# Altium PCB PCB2.PcbDoc
Units mm, origin at the board's own origin, x right, y up, seen from the top; angles counter-clockwise.
Board outline 100.2 x 80.01 mm, 2 copper layers (Top Layer, Bottom Layer); 22 components, 23 nets, 88 pads, 11 vias.
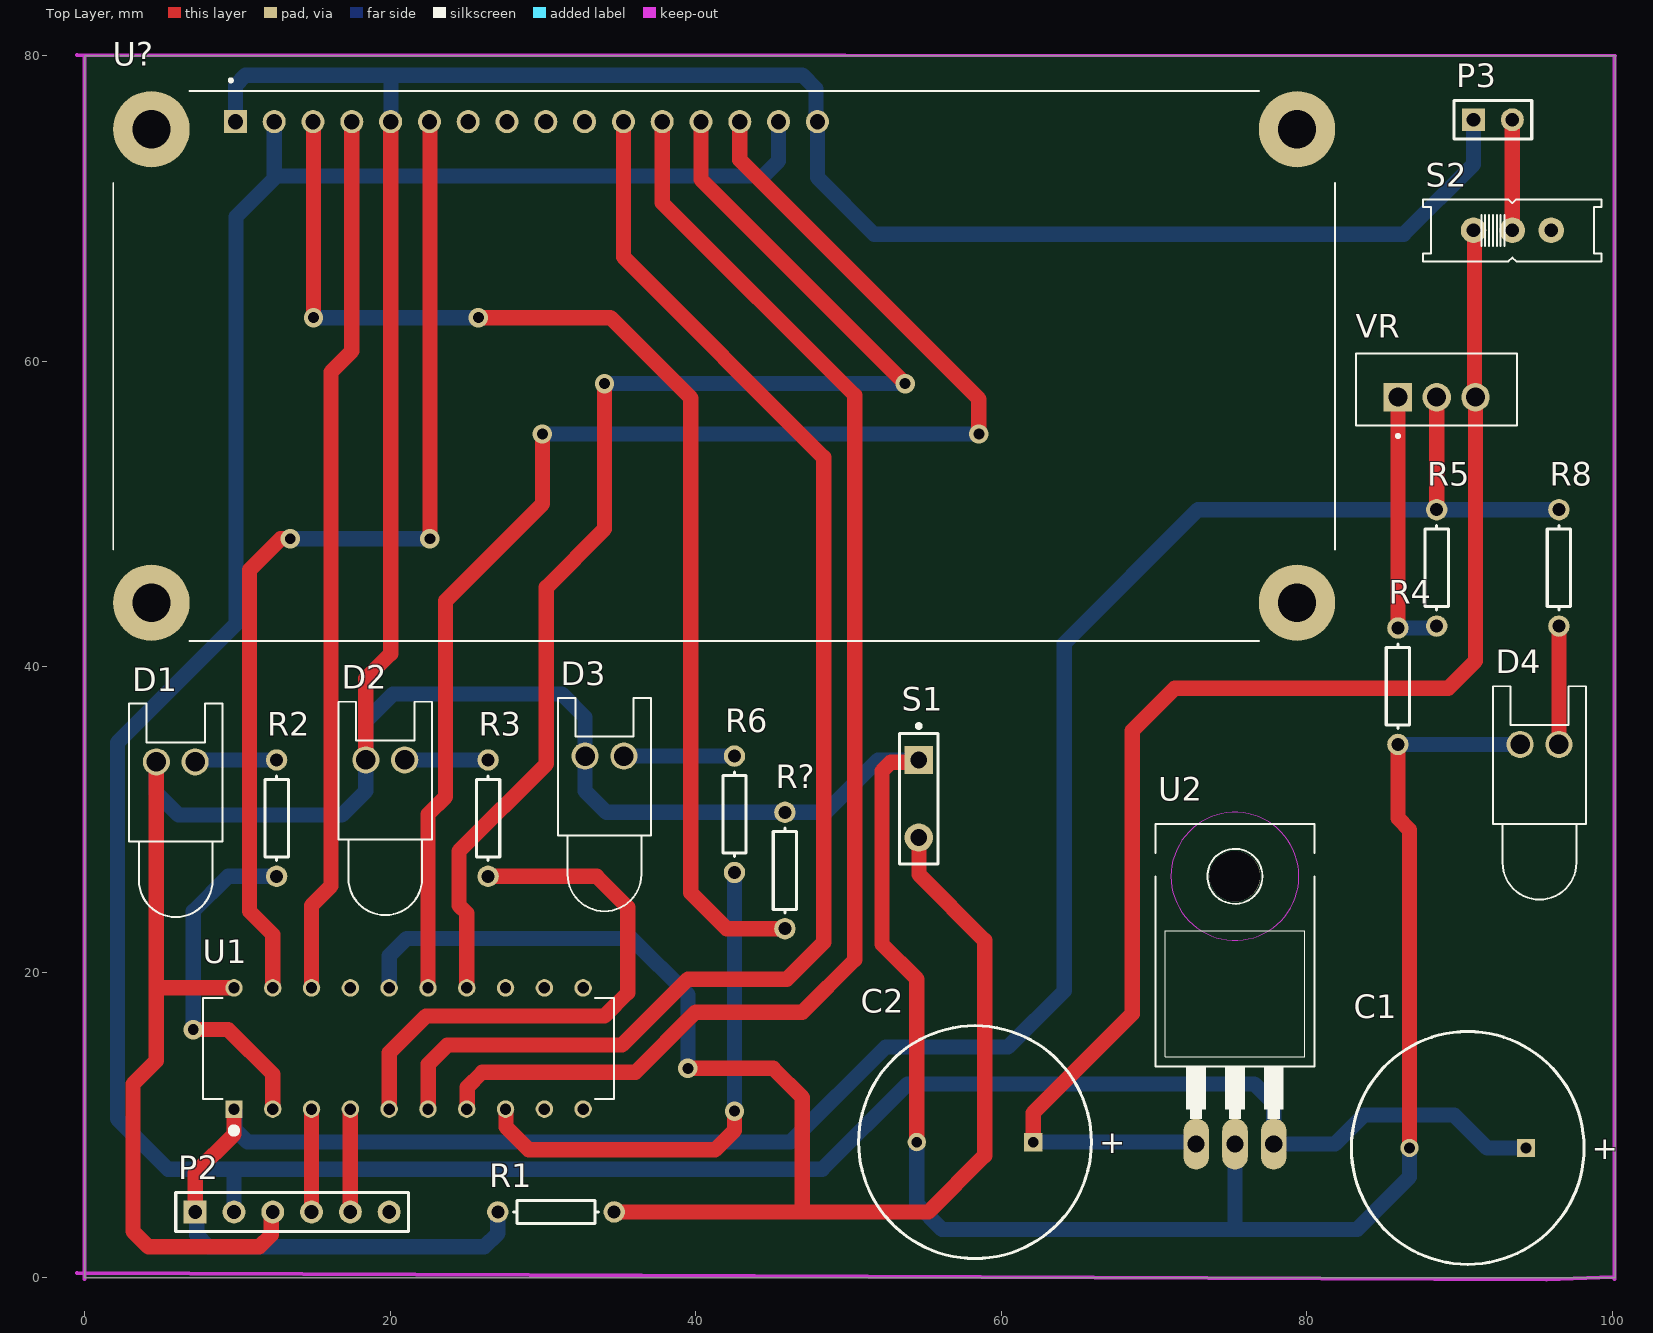
[diagram p0: Top Layer view]
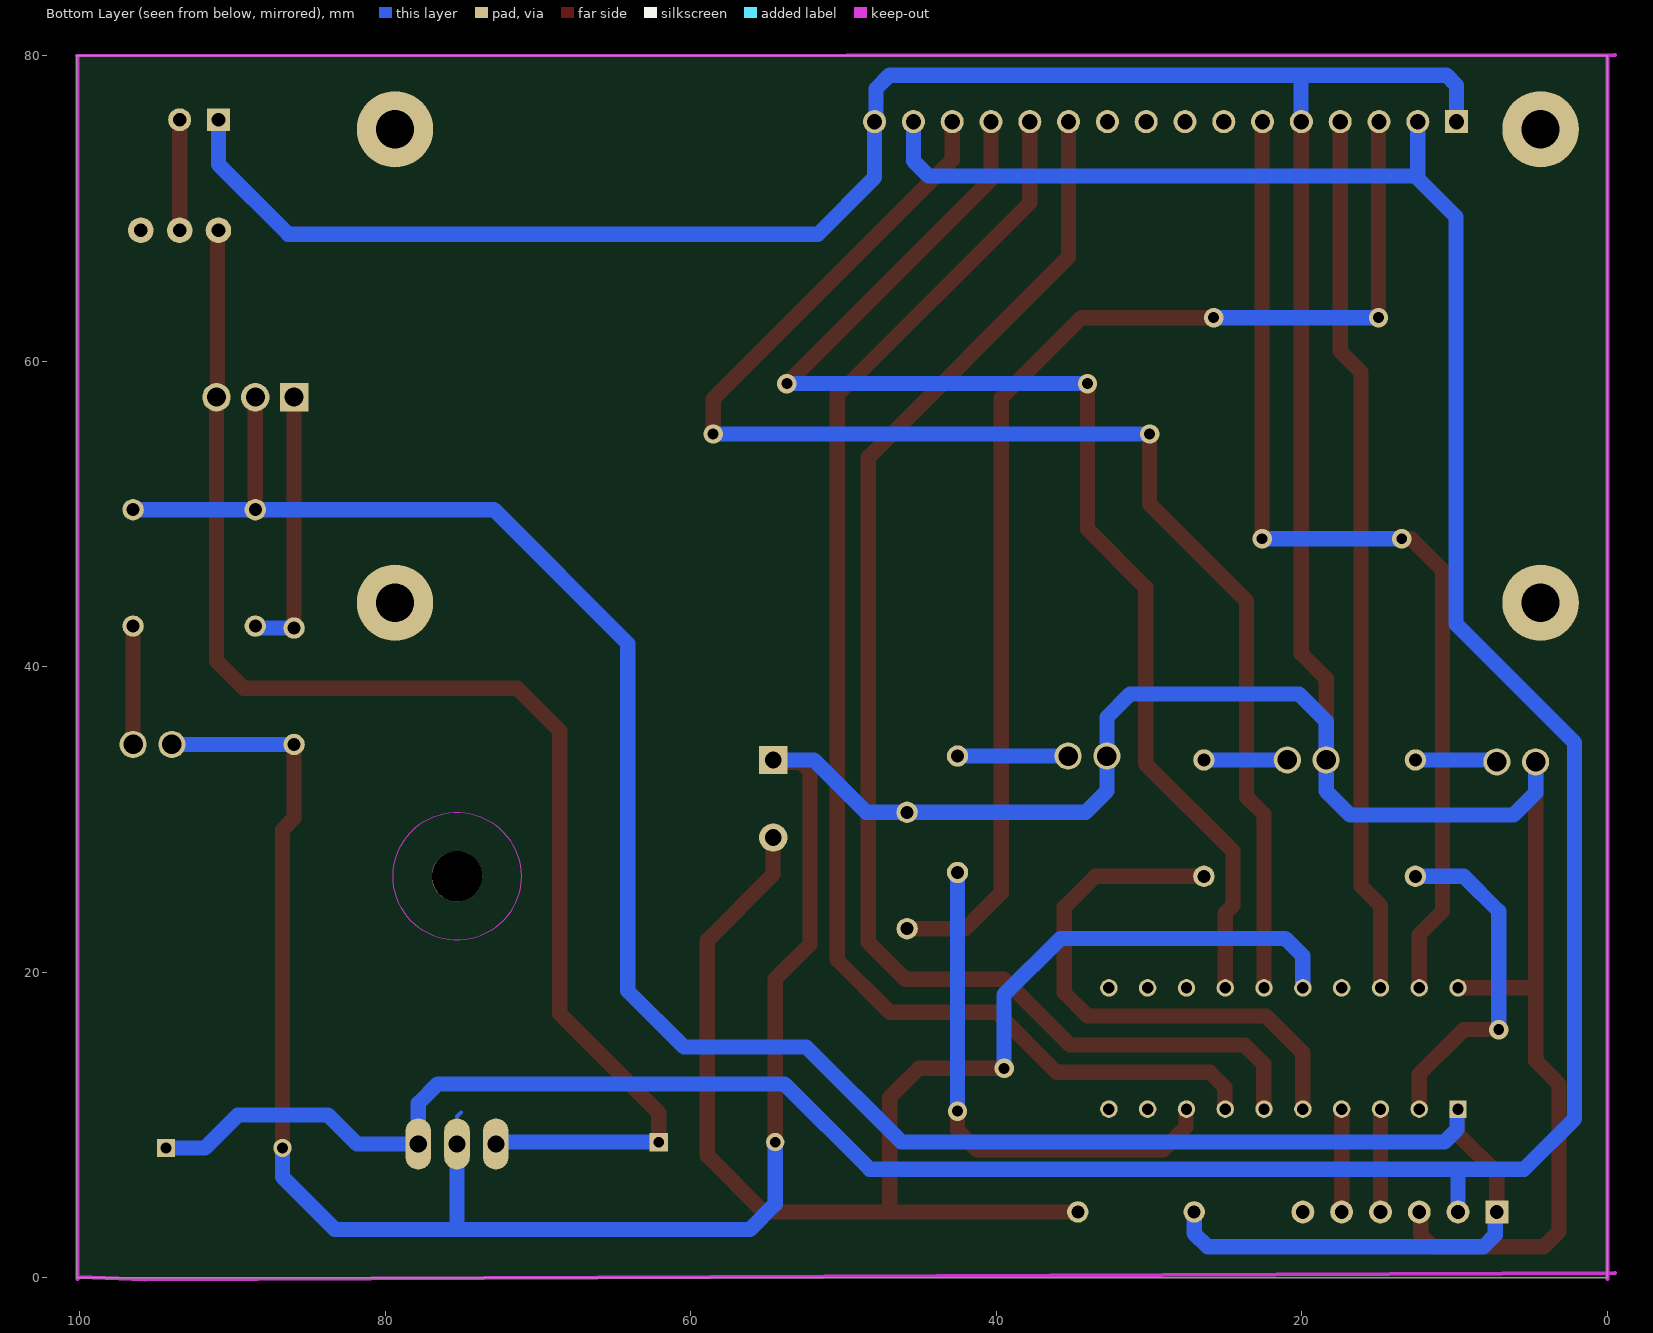
[diagram p1: Bottom Layer view, seen from below]

## Layer stack, top to bottom
Top Solder: solder mask 0.0102, Solder Resist, Dk 3.5
Top Layer: signal copper 0.0356
Dielectric 1: dielectric 0.32, FR-4, Dk 4.8
Bottom Layer: signal copper 0.0356
Bottom Solder: solder mask 0.0102, Solder Resist, Dk 3.5

## Board outline
0,0 0,80.01 100.203,80.01 100.203,0

## Design rules (kind name [scope] priority, off if disabled: settings)
Clearance [All] p1: gap=0.254 ignorepadtopadclearanceinfootprint=FALSE except(0: Arc-Hole Track-Hole SMDPad-Hole THPad-Hole Via-Hole Fill-Hole Poly-Hole Region-Hole Text-Hole)
PolygonConnect [All] p1: connectstyle=Relief reliefconductorwidth=0.254 reliefentries=4 polygonreliefangle="90 Angle" airgapwidth=0.254
RoutingVias [All] p1: holewidth=0.711 width=1.27 viastyle="Through Hole" minholewidth=0.711 minwidth=1.27 maxholewidth=0.711 maxwidth=1.27
SolderMaskExpansion [All] p1: expansion=0.102 istentingtop=FALSE
Width [All] p1: maxlimit=50 minlimit=0.254 preferedwidth=1
30 further rules are at their usual default settings.

## Components (designator, comment, footprint, x,y, rotation, side; value= is the part's Value field where it differs from the comment)
C1 "Cap Pol1" RB7.6-15 90.551,8.509 r0 top value=0.1
C2 "Cap Pol1" RB7.6-15 58.293,8.89 r0 top value=0.1
D1 "LED0" LED-0 5.969,33.782 r0 top
D2 "LED0" LED-0 19.685,33.909 r0 top
D3 "LED0" LED-0 34.036,34.163 r0 top
D4 "LED0" LED-0 95.25,34.925 r0 top
P2 "hc05" HDR1X6 7.239,4.318 r0 top
P3 "Header 2" HDR1X2 90.932,75.819 r0 top
R1 "Res1" AXIAL-0.3 30.861,4.318 r0 top value=47k
R2 "Res1" AXIAL-0.3 12.573,30.099 r270 top value=1K
R3 "Res1" AXIAL-0.3 26.416,30.099 r270 top value=1K
R4 "Res1" AXIAL-0.3 85.979,38.735 r270 top value=390
R5 "Res1" AXIAL-0.3 88.519,46.482 r90 top value=220
R6 "Res1" AXIAL-0.3 42.545,30.353 r270 top value=1K
R8 "Res1" AXIAL-0.3 96.52,46.482 r90 top value=1K
R? "Res1" AXIAL-0.3 45.847,26.67 r90 top value=1K
S1 "SW-PB" SPST-2 54.61,31.369 r270 top
S2 "EG1218" EG1218 93.472,68.58 r0 top
U1 "MSP430G2553IN20" DIP794W45P254L2692H508Q20 21.209,15.019 r90 top
U2 "LM7805" TO220 75.311,15.113 r0 top
U? "LCD2X16" LCD_LCD2X16 41.875,59.696 r0 top
VR "LM317T" TO254P1054X470X1955-3 88.519,57.658 r0 top

## Footprints (in the part's own frame and the unit in brackets; to place one, negate y for a bottom-side part, rotate by r counter-clockwise, add the part's x,y. Pads: shape width x height; smd on the part's side, far side on the other; paste and mask are expansions set on the pad)
AXIAL-0.3 [mm] "Axial Device, Thru-Hole; 2 Leads; 0.3 in Pin Spacing"
  round 1.4 hole 0.85: 1(-3.81,0) 2(3.81,0)
  silkscreen extent -2.77,-0.76 2.77,0.76
DIP794W45P254L2692H508Q20 [mm]
  rect 1.14x1.14 hole 0.74: 1(-3.97,11.43)
  round 1.14 hole 0.74: 2(-3.97,8.89) 3(-3.97,6.35) 4(-3.97,3.81) 5(-3.97,1.27) 6(-3.97,-1.27) 7(-3.97,-3.81) 8(-3.97,-6.35) 9(-3.97,-8.89) 10(-3.97,-11.43) 11(3.97,-11.43) 12(3.97,-8.89) 13(3.97,-6.35) 14(3.97,-3.81) 15(3.97,-1.27) 16(3.97,1.27) 17(3.97,3.81) 18(3.97,6.35) 19(3.97,8.89) 20(3.97,11.43)
  silkscreen extent -5.57,-13.46 3.3,13.46
EG1218 [mil]
  round 66 hole 35.43: O(-100,0) P(0,0) S(100,0)
  silkscreen extent -230,-80 230,80
HDR1X2 [mm] "Connector; Header; 2 Position"
  rect 1.5x1.5 hole 0.9: 1(0,0)
  round 1.5 hole 0.9: 2(2.54,0)
  silkscreen extent -1.27,-1.27 3.81,1.27
HDR1X6 [mm] "Connector; Header; 6 Position"
  rect 1.5x1.5 hole 0.9: 1(0,0)
  round 1.5 hole 0.9: 2(2.54,0) 3(5.08,0) 4(7.62,0) 5(10.16,0) 6(12.7,0)
  silkscreen extent -1.27,-1.27 13.97,1.27
LCD_LCD2X16 [mm]
  rect 1.508x1.508 hole 1: 1(-32,16)
  round 1.508 hole 1: 2(-29.46,16) 3(-26.92,16) 4(-24.38,16) 5(-21.84,16) 6(-19.3,16) 7(-16.76,16) 8(-14.22,16) 9(-11.68,16) 10(-9.14,16) 11(-6.6,16) 12(-4.06,16) 13(-1.52,16) 14(1.02,16) 15(3.56,16) 16(6.1,16)
  round 5 hole 2.5: S1(-37.5,15.5) S2(37.5,15.5) S3(37.5,-15.5) S4(-37.5,-15.5)
  silkscreen extent -40,-18 40,18.8
LED-0 [mil] "LED; 2 Leads"
  round 70 hole 50: 1(50,0) 2(-50,0)
  silkscreen extent -120,-400 120,150
RB7.6-15 [mm] "Polarized Capacitor (Radial); 2 Leads"
  rect 1.2x1.2 hole 0.7: 1(3.81,0)
  round 1.2 hole 0.7: 2(-3.81,0)
  silkscreen extent -7.62,-7.62 7.62,7.62
SPST-2 [mm] "Switch; 2 Leads"
  rect 1.85x1.85 hole 1.1: 1(-2.54,0)
  round 1.85 hole 1.1: 2(2.54,0)
  silkscreen extent -4.89,-1.27 4.28,1.27
TO220 [mil]
  oval 66x132 hole 44: 1(-100,-250) 2(0,-250) 3(100,-250)
  round 130 hole 130 unplated: ""(0,440)
  Keep-Out Layer circle w0: c0,440 r165
  Keep-Out Layer circle w0: c0,440 r165
  silkscreen extent -205,-185 205,575
TO254P1054X470X1955-3 [mm]
  rect 1.86x1.86 hole 1.24: 1(-2.54,0)
  round 1.86 hole 1.24: 2(0,0) 3(2.54,0)
  silkscreen extent -5.27,-2.64 5.27,2.86

## Part data
C1 C2: "Polarized Capacitor (Radial)", LatestRevisionDate=17-Jul-2002, LatestRevisionNote="Re-released for DXP Platform.", PackageDescription="Polarized Capacitor (Radial); 2 Leads", PackageReference=RB7.6-15, Published=8-Jun-2000, Publisher="Altium Limited"
D1 D2 D3 D4: "Typical INFRARED GaAs LED", LatestRevisionDate=08-Jul-2005, LatestRevisionNote="Mech Layer 1 removed.", PackageDescription="LED; 2 Leads", PackageReference=LED-0, Published=8-Jun-2000, Publisher="Altium Limited"
P2: library part "Header 6", "Header, 6-Pin", LatestRevisionDate=17-Jul-2002, LatestRevisionNote="Re-released for DXP Platform.", Publisher="Altium Limited"
P3: "Header, 2-Pin", LatestRevisionDate=17-Jul-2002, LatestRevisionNote="Re-released for DXP Platform.", Publisher="Altium Limited"
R1 R2 R3 R4 R5 R6 R8 R?: "Resistor", LatestRevisionDate=17-Jul-2002, LatestRevisionNote="Re-released for DXP Platform.", PackageDescription="Axial Device, Thru-Hole; 2 Leads; 0.3 in Pin Spacing", PackageReference=AXIAL-0.3, Published=8-Jun-2000, Publisher="Altium Limited"
S1: "Switch", LatestRevisionDate=17-Jul-2002, LatestRevisionNote="Re-released for DXP Platform.", PackageDescription="Switch; 2 Leads", PackageReference=SPST-2, Published=24-Mar-1999, Publisher="Altium Limited"
S2: "æ»‘å‹•é–‹é—œSPDTé€šå­”", Package="Custom package E-Switch", Availability=Unavailable, MF=E-Switch, MP=EG1218, Price=None, SnapEDA_Link=https://www.snapeda.com/parts/EG1218/E-Switch/view-part/13895/?ref=snap
U1: "MSP430 MSP430G2xx Microcontroller IC 16-Bit 16MHz 16KB _16K x 8_ FLASH 20-PDIP", Package="PDIP-20 Texas Instruments", Availability=Unavailable, MF="Texas Instruments", MP=MSP430G2553IN20, Price=None, SnapEDA_Link=https://www.snapeda.com/parts/MSP430G2553IN20/Texas%20Instruments/view-part/46372/?ref=snap
U2: "Linear Voltage Regulator IC 1 Output 1.5A SOT-223-4", Package="TO-220 Texas Instruments", Availability=Unavailable, MF="Texas Instruments", MP=LM7805, Price=None, SnapEDA_Link=https://www.snapeda.com/parts/LM7805/Texas%20Instruments/view-part/2302466/?ref=snap
U?: "Display; Display: LCD 2x16 characters (blue backlight)", Package=None, Availability=Unavailable, MP=LCD2X16, Price=None
VR: "1.5-A, 40-V, adjustable linear voltage regulator 3-TO-220", Package="TO-220-3 Texas Instruments", Arrow_Electronics-Purchase-URL=https://snapeda.com/shop?store=Arrow+Electronics&id=2756289, Availability=Unavailable, DigiKey-Purchase-URL=https://snapeda.com/shop?store=DigiKey&id=2756289, MF="Texas Instruments", Mouser-Purchase-URL=https://snapeda.com/shop?store=Mouser&id=2756289, MP=LM317T, Price=None, SnapEDA_Link=https://www.snapeda.com/parts/LM317T/Texas%20Instruments/view-part/2756289/?ref=snap

## Via types
v1: diameter 1.27, hole 0.711, Top Layer to Bottom Layer, 11 vias

## Nets (pads, with @x,y where several pads share a name; then routed paths per layer and width w, separated by ;. In a path a pad name is that pad's centre, name@x,y a point inside that pad or via, vN(x,y) a via of type N, cw(c..) or ccw(c..) an arc to the next point about the centre after c; other vN are vias at no path point)
GND: C1.2 C2.2 D1.2 D2.2 D3.2 D4.2 P2.3 P3.1 R4.2 R?.2 S1.1 U1.20 U2.2 U?.1 U?.5 U?.16 | length 364.6
  Top Layer w0.254: U?.5@19.891,75.552 U?.5
  Top Layer w1: D1.2 4.699,19.05 ; U1.20 4.76,18.989 4.699,19.05 ; P2.3 12.223,4.222 12.223,2.825 11.43,2.032 4.191,2.032 3.175,3.048 3.175,12.7 4.699,14.224 4.699,19.05 ; D2.2 18.415,39.243 20.035,40.863 U?.5 ; C2.2 54.483,19.558 52.197,21.844 52.197,33.179 52.783,33.765 54.466,33.765 S1.1 ; R4.2 85.979,30.099 86.741,29.337 C1.2
  Bottom Layer w0.254: 75.057,10.82 75.311,10.566
  Bottom Layer w1: D1.2 4.699,31.75 6.147,30.302 16.84,30.302 18.415,31.877 D2.2 18.415,36.449 20.193,38.227 31.242,38.227 32.766,36.703 D3.2 32.766,31.877 34.163,30.48 R?.2 48.514,30.48 51.943,33.909 S1.1 ; U?.1 9.875,78.074 10.541,78.74 20.066,78.74 ; U?.5 20.066,75.727 20.066,78.74 ; C2.2 54.483,4.826 56.134,3.175 75.311,3.175 ; U2.2 75.311,3.175 ; R4.2 D4.2 ; C1.2 86.741,6.604 83.312,3.175 75.311,3.175 ; P3.1 90.932,72.898 86.36,68.326 51.689,68.326 47.975,72.04 U?.16 47.878,75.793 47.878,77.852 46.99,78.74 20.066,78.74
NetC1_1: C1.1 P2.2 U2.3 U?.2 U?.15 | length 209.2
  Bottom Layer w1: P2.2 9.779,7.112 ; U?.2 12.415,71.978 ; U?.15 45.435,73.121 44.45,72.136 12.573,72.136 12.415,71.978 ; C1.1 91.821,8.509 89.662,10.668 83.769,10.668 81.864,8.763 U2.3 77.851,11.43 76.581,12.7 53.873,12.7 48.285,7.112 9.779,7.112 ; 9.779,7.112 5.461,7.112 2.159,10.414 2.159,35.052 9.906,42.799 9.906,69.469 12.415,71.978
NetC2_1: C2.1 S2.O U2.1 VR.3 | length 92.9
  Top Layer w1: C2.1 62.103,10.795 68.58,17.272 68.58,35.814 71.374,38.608 89.281,38.608 91.059,40.386 VR.3 90.995,57.721 90.995,68.516 S2.O
  Bottom Layer w0.254: U2.1@72.644,8.89 U2.1
  Bottom Layer w1: C2.1 U2.1@72.644,8.89
NetD1_1: D1.1 R2.1 | length 5.4
  Bottom Layer w0.254: D1.1 D1.1@7.366,33.909
  Bottom Layer w1: D1.1@7.366,33.909 R2.1
NetD2_1: D2.1 R3.1 | length 5.5
  Bottom Layer w1: D2.1 R3.1
NetD3_1: D3.1 R6.1 | length 7.2
  Bottom Layer w1: D3.1 R6.1
NetD4_1: D4.1 R8.1 | length 7.7
  Top Layer w1: D4.1 R8.1
NetP2_1: P2.1 R1.1 R5.2 R8.2 U1.1 VR.2 | length 157.3
  Top Layer w1: P2.1 7.239,6.858 9.779,9.398 U1.1 ; R5.2 VR.2
  Bottom Layer w1: P2.1 7.351,4.206 7.351,2.809 8.128,2.032 26.162,2.032 27.051,2.921 R1.1 ; U1.1 9.849,10.979 9.849,9.709 10.668,8.89 46.228,8.89 52.451,15.113 60.452,15.113 64.135,18.796 64.135,41.529 72.898,50.292 R5.2 R8.2
NetP2_4: P2.4 U1.3 | length 6.7
  Top Layer w1: P2.4 U1.3
NetP2_5: P2.5 U1.4 | length 6.7
  Top Layer w1: P2.5 U1.4
NetP3_2: P3.2 S2.P | length 7.2
  Top Layer w1: S2.P P3.2
NetR1_2: R1.2 S1.2 U1.16 | length 92.7
  Top Layer w1: R1.2 46.99,4.318 ; v1(39.497,13.716) 45.085,13.716 46.99,11.811 46.99,4.318 ; S1.2 54.622,28.817 54.622,26.404 58.928,22.098 58.928,8.001 55.245,4.318 46.99,4.318
  Bottom Layer w1: U1.16 19.939,21.082 21.082,22.225 35.814,22.225 39.497,18.542 v1(39.497,13.716)
NetR2_2: R2.2 U1.2 | length 22.9
  Top Layer w1: v1(7.112,16.256) 9.398,16.256 12.319,13.335 U1.2
  Bottom Layer w1: v1(7.112,16.256) 7.112,24.003 9.398,26.289 R2.2
NetR3_2: R3.2 U1.5 | length 36.5
  Top Layer w1: U1.5 19.939,14.732 22.352,17.145 34.036,17.145 35.56,18.669 35.56,24.257 33.528,26.289 R3.2
NetR4_1: R4.1 R5.1 VR.1 | length 17.7
  Top Layer w1: R4.1 VR.1
  Bottom Layer w0.254: R5.1@88.392,42.545 R5.1
  Bottom Layer w1: R4.1 R5.1@88.392,42.545
NetR6_2: R6.2 U1.8 | length 34.2
  Top Layer w1: U1.8 27.586,11.022 27.586,9.879 29.083,8.382 41.275,8.382 42.545,9.652 v1(42.545,10.922)
  Bottom Layer w1: v1(42.545,10.922) R6.2
NetR?_1: R?.1 U?.3 | length 79.2
  Top Layer w1: U?.3 14.986,75.665 v1(14.986,62.865) ; v1(25.781,62.865) 34.417,62.865 39.688,57.594 39.688,25.209 42.037,22.86 R?.1
  Bottom Layer w1: v1(14.986,62.865) v1(25.781,62.865)
NetU1_6: U1.6 U?.11 | length 91.3
  Top Layer w1: U1.6 22.506,11.076 22.506,13.997 23.749,15.24 35.179,15.24 39.497,19.558 45.974,19.558 48.387,21.971 48.387,53.721 35.275,66.833 U?.11
NetU1_7: U1.7 U?.12 | length 90.4
  Top Layer w1: U1.7 25.046,11.076 25.046,12.473 26.035,13.462 36.068,13.462 40.005,17.399 46.99,17.399 50.419,20.828 50.419,57.785 37.815,70.389 U?.12
NetU1_14: U1.14 U?.13 | length 86.1
  Top Layer w1: U1.14 25.019,23.876 24.511,24.384 24.511,27.94 30.226,33.655 30.226,45.212 34.036,49.022 v1(34.036,58.547) ; U?.13 40.355,71.913 v1(53.721,58.547)
  Bottom Layer w1: v1(34.036,58.547) v1(53.721,58.547)
NetU1_15: U1.15 U?.14 | length 94.9
  Top Layer w1: U1.15 22.479,30.353 23.622,31.496 23.622,44.323 29.972,50.673 v1(29.972,55.245) ; U?.14 42.895,73.183 58.547,57.531 v1(58.547,55.245)
  Bottom Layer w1: v1(29.972,55.245) v1(58.547,55.245)
NetU1_18: U1.18 U?.4 | length 57.8
  Top Layer w1: U1.18 14.859,24.384 16.129,25.654 16.129,59.309 17.495,60.675 U?.4
NetU1_19: U1.19 U?.6 | length 68
  Top Layer w1: U1.19 12.319,22.479 10.795,24.003 10.795,46.355 12.827,48.387 v1(13.462,48.387) ; U?.6 22.606,75.665 v1(22.606,48.387)
  Bottom Layer w1: v1(13.462,48.387) v1(22.606,48.387)
pads on no net: P2.6 S2.S U1.9 U1.10 U1.11 U1.12 U1.13 U1.17 U2. U?.7 U?.8 U?.9 U?.10 U?.S1 U?.S2 U?.S3 U?.S4

## Keep-outs
Keep-Out Layer:
  lines w0.254: -0.508,80.071 100.203,80.01 ; -0.507,0.311 95.718,-0.097 100.076,0.061 ; 0,-0.066 0,79.944 ; 100.17,-0.066 100.17,79.944

## Text inside footprints (layer, text, board x,y; h text height)
C1: Top Overlay "+" at 98.683,7.772 h1.5
C2: Top Overlay "+" at 66.425,8.153 h1.5
U2: Mechanical 13 "1" at 72.13,15.113 h1.27; Mechanical 13 "2" at 74.675,15.113 h1.27; Mechanical 13 "3" at 77.216,15.113 h1.27